# Altium PCB PCB1.PcbDoc
Units mil, origin at the board's own origin, x right, y up, seen from the top; angles counter-clockwise.
Board outline 1105 x 1305 mil, 2 copper layers (Top Layer, Bottom Layer); 29 components, 31 nets, 125 pads, 74 vias.
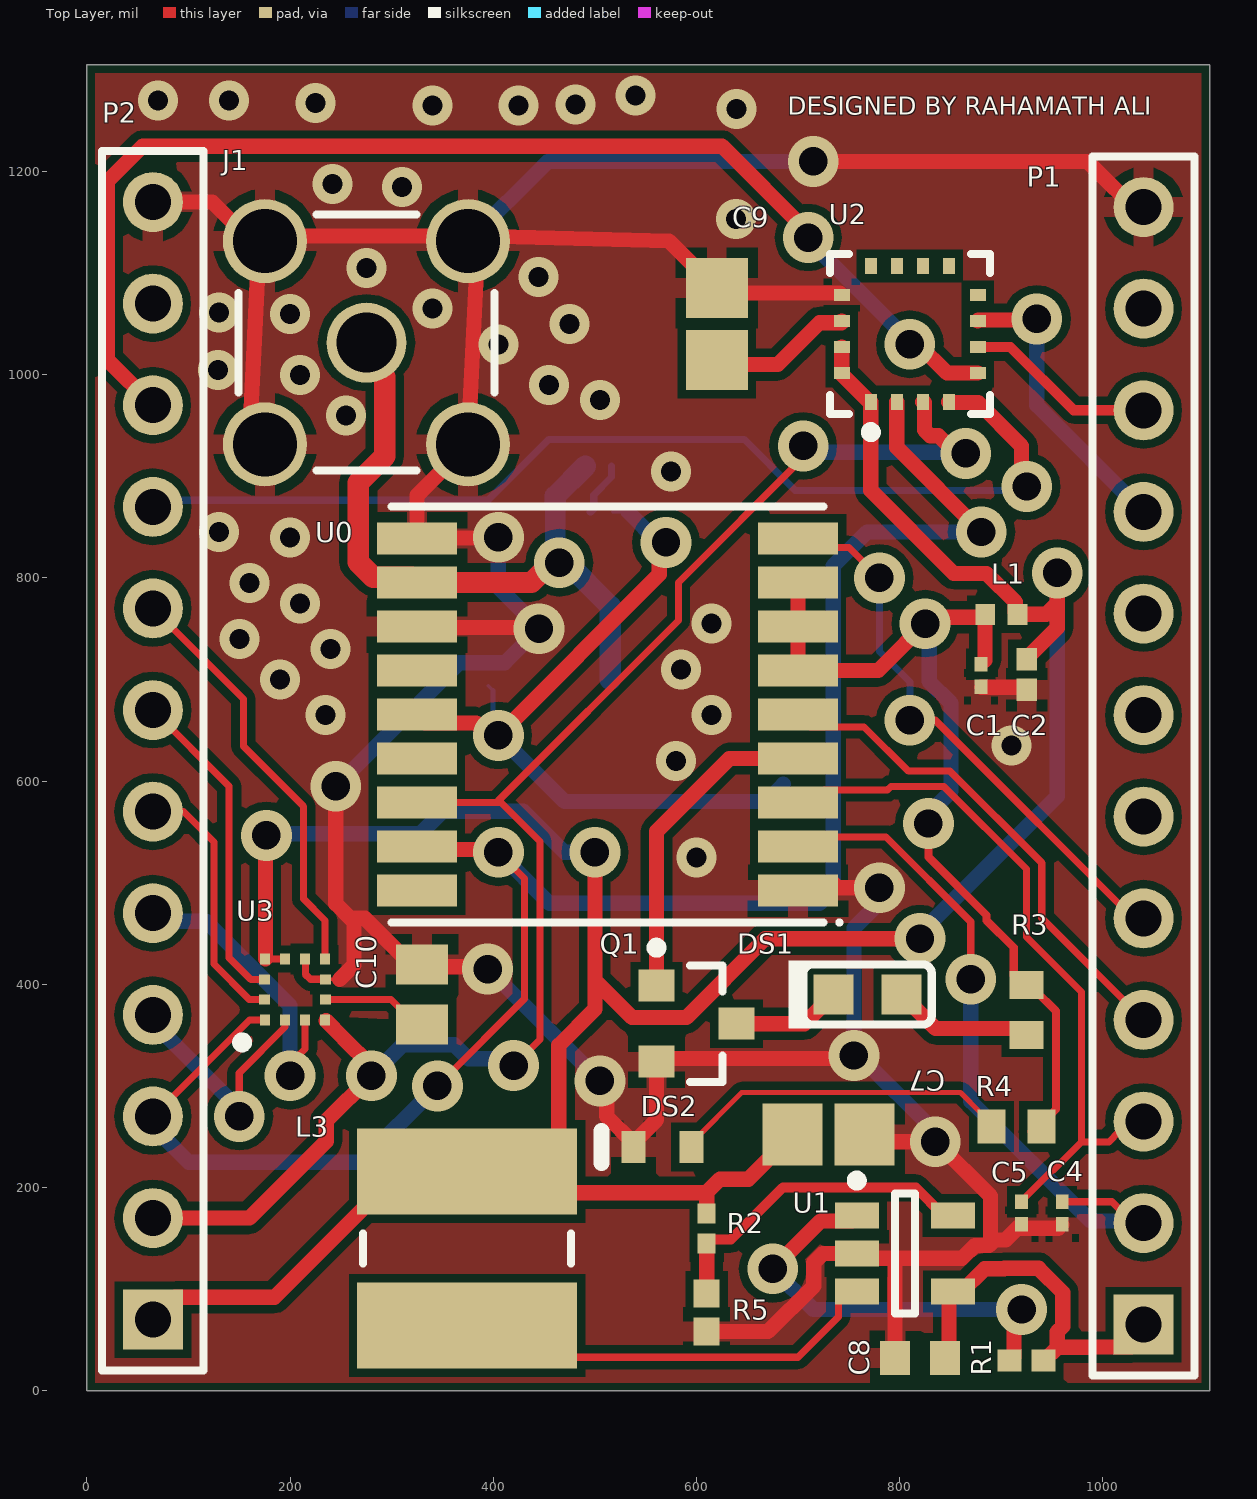
[diagram p0: Top Layer view]
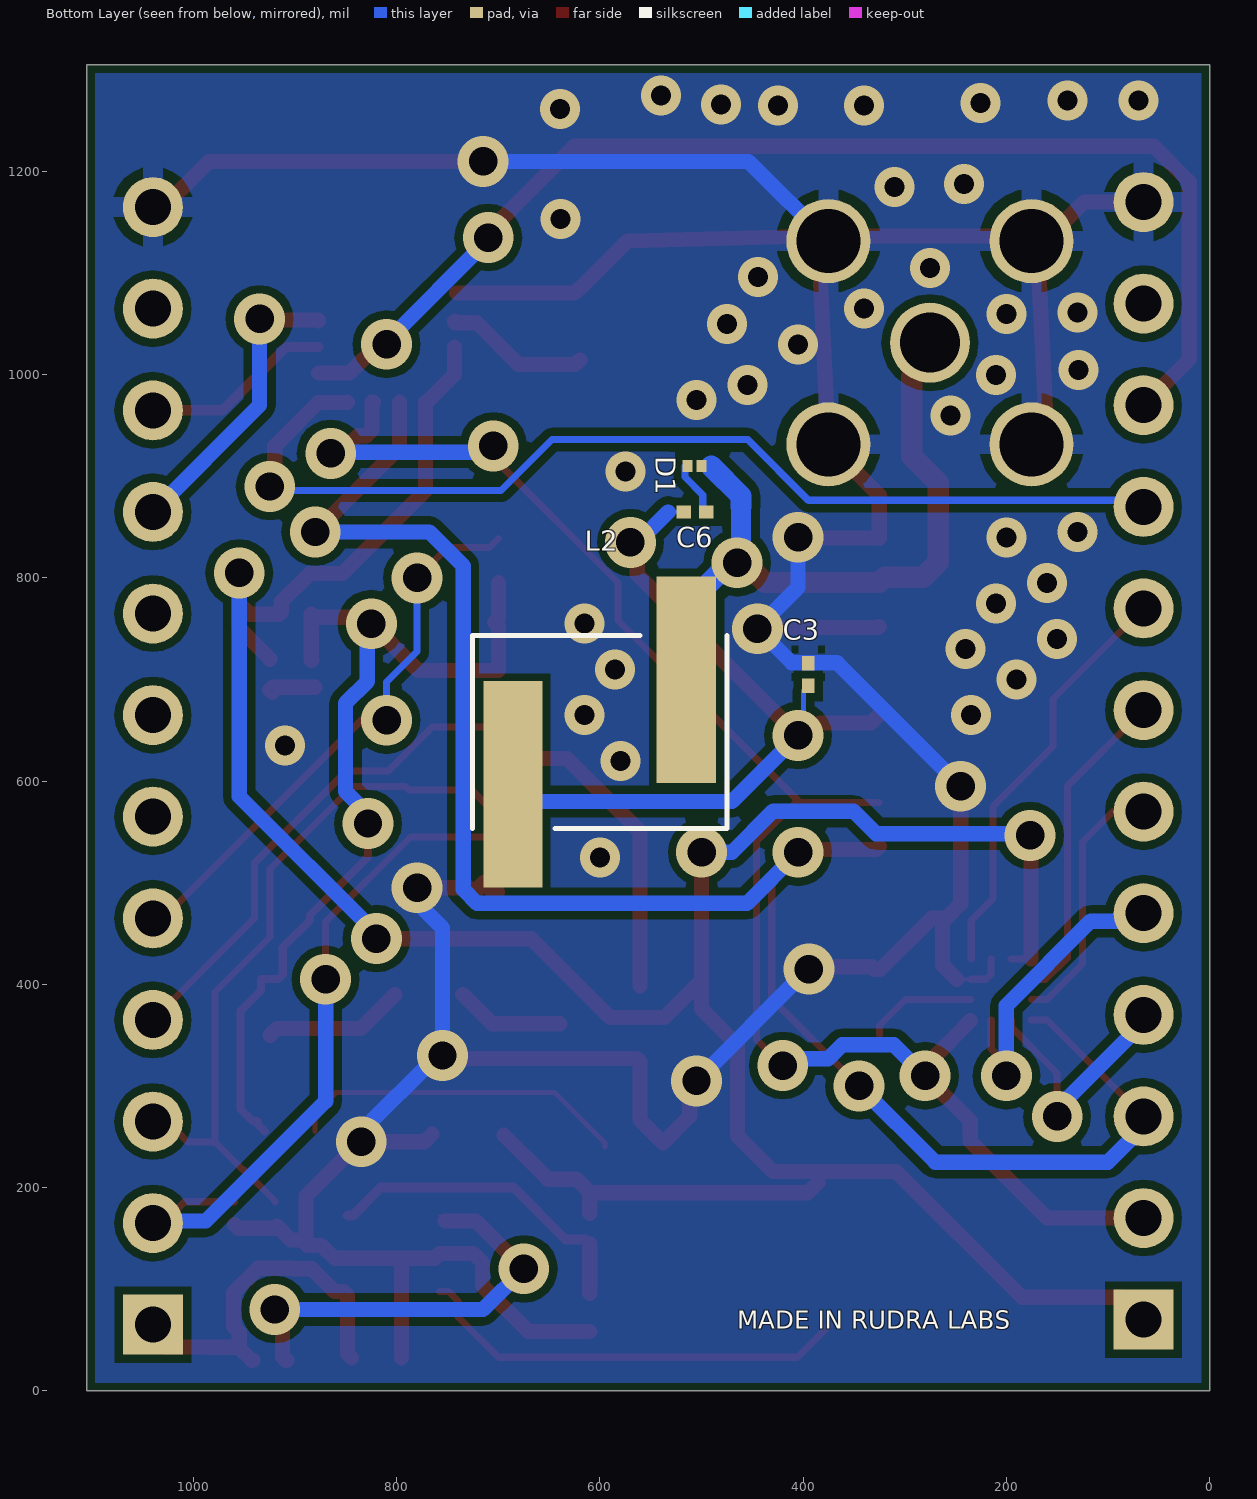
[diagram p1: Bottom Layer view, seen from below]

## Layer stack, top to bottom
Top Solder: solder mask 0.4, Solder Resist, Dk 3.5
Top Layer: signal copper 1.4
Dielectric 1: dielectric 12.6, FR-4, Dk 4.8
Bottom Layer: signal copper 1.4
Bottom Solder: solder mask 0.4, Solder Resist, Dk 3.5

## Board outline
0,0 1105,0 1105,1305 0,1305

## Design rules (kind name [scope] priority, off if disabled: settings)
BoardOutlineClearance [All] p1: gap=7.87 ignorepadtopadclearanceinfootprint=FALSE except(15.75: Arc-SplitBarrior Arc-SplitContinuation Track-SplitBarrior Track-SplitContinuation SMDPad-SplitBarrior SMDPad-SplitContinuation THPad-SplitBarrior THPad-SplitContinuation Via-SplitBarrior Via-SplitContinuation Fill-SplitBarrior Fill-SplitContinuation Poly-SplitBarrior Poly-SplitContinuation Region-SplitBarrior Region-SplitContinuation Text-SplitBarrior Text-SplitContinuation)
Clearance "Clearance Bottom Layer" [OnLayer('Bottom Layer')] p1: gap=8 ignorepadtopadclearanceinfootprint=TRUE except(10: Arc-Text Track-Text SMDPad-Text THPad-Text Via-Text Fill-Text Poly-Text Region-Text Text-Text)
Clearance "Clearance Top Layer" [OnLayer('Top Layer')] p2: gap=8 ignorepadtopadclearanceinfootprint=TRUE except(10: Arc-Text Track-Text SMDPad-Text THPad-Text Via-Text Fill-Text Poly-Text Region-Text Text-Text)
Clearance [All] p3: gap=7.87 ignorepadtopadclearanceinfootprint=FALSE except(3.5: Arc-Arc Arc-Track Arc-SMDPad Track-Track Track-SMDPad SMDPad-SMDPad; 5: Arc-Via Track-Via SMDPad-Via THPad-Via Via-Via; 10: Arc-Text Track-Text SMDPad-Text THPad-Text Via-Text Fill-Text Poly-Text Region-Text Text-Text)
HoleSize [All] p1: absolutevalues=TRUE maxlimit=248.03 minlimit=7.87 maxpercent=80.000 minpercent=20.000
MinimumAnnularRing [All] p1: minimumring=3
MinimumSolderMaskSliver [All] p1: minsoldermaskwidth=3.94
PolygonConnect PolygonConnect_1 [All] p1: thpad.connectstyle=Relief thpad.reliefconductorwidth=20 thpad.reliefentries=4 thpad.polygonreliefangle="90 Angle" thpad.airgapwidth=10 smdpad.connectstyle=Relief smdpad.reliefconductorwidth=20 smdpad.reliefentries=4 smdpad.polygonreliefangle="90 Angle" smdpad.airgapwidth=10 via.connectstyle=Direct via.reliefconductorwidth=20 via.reliefentries=4 via.polygonreliefangle="90 Angle" via.airgapwidth=10
RoutingCorners [All] p1: cornerstyle=Round minsetback=100 maxsetback=100
RoutingVias [All] p1: holewidth=19.68 width=39.37 viastyle="Through Hole" minholewidth=7.87 minwidth=17.72 maxholewidth=39.37 maxwidth=78.74
SilkToSilkClearance [All] p1: silktosilkclearance=3.94
SilkToSolderMaskClearance [IsPad] p1: minsilkscreentomaskgap=3.94 clearancetoexposedcopper=TRUE
SolderMaskExpansion [All] p1: expansion=4
Width [All] p1: maxlimit=100 minlimit=3.5 preferedwidth=15
25 further rules are at their usual default settings.

## Classes and differential pairs
component class Sheet2: C9 C10 P1 P2 U2 U3
component class Sheet1: C1 C2 C3 C4 C5 C6 C7 C8 D1 DS1 DS2 J1 L1 L2 L3 Q1 R1 R2 R3 R4 R5 U0 U1

## Components (designator, comment, footprint, x,y, rotation, side; value= is the part's Value field where it differs from the comment)
C1 "56pF" CAPC0603X33X15LL03T05 880,703.98 r90 top
C2 "10nF" CAPC1005X60X30LL05T10 925,704.96 r90 top
C3 "56pF" CAPC0603X33X15LL03T05 395,705 r90 bottom
C4 "56pF" CAPC0603X33X15LL03T05 960,175 r270 top
C5 "56pF" CAPC0603X33X15LL03T05 920,175 r270 top
C6 "56pF" CAPC0603X33X15LL03T05 506.4,865 r0 bottom
C7 "22uF" CAPC2013X145X50ML20T25 730,252.45 r180 top
C8 "4.7uF" CAPC1608X90X35LL10T15 820,32.47 r0 top
C9 "0.22uF" CAPC2013X140X50ML20T25 620,1050 r270 top
C10 "0.1uF" CAPC2013X135X45LL10T25 330,390 r270 top
D1 "ESDARF02-1BU2CK" ESDARFO2-1BU2CK 506.89,910 r180 bottom
DS1 "KP-1608MGC" KING-0603LED_GREEN_V 768.47,390 r0 top
DS2 "TLMS1000-GS08" VISH-TLMS1000_V 566.46,240 r180 top
J1 "5-1814832-1" TECO-5-1814832-1_V 275.21,1031.53 r0 top
L1 "27nF" IND1005X55X25LL5T10 900,764.18 r180 top
L2 "56nH" WE-CAIR_4248 600.24,648.42 r180 bottom
L3 "10uH" WE-PD2-MS 374.36,140 r90 top
P1 "Header 12" HDR1X12 1040,65 r90 top
P2 "Header 12" HDR1X12 65,70 r90 top
Q1 "MMBTA42LT1G" ONSC-SOT-23-3-318-08_V 600,361.31 r0 top
R1 "1M" RESC1005X40X25NL05T10 925,30 r0 top
R2 "68K" RESC1005X37X25LL05T10 610,159.76 r90 top
R3 "1K" RESC1608X55X30LL15T15 925,375 r90 top
R4 "1K" RESC1608X55X30LL15T15 915,260 r0 top
R5 "15K" RESC1005X40X25ML05T10 610,76.92 r90 top
U0 "?" "TESEO LIV 3F" 932.4,675.61 r180 top
U1 "ST1S12GR" TSOT23-5L_N 805,135 r0 top
U2 "L3GD20TR" STM-LGA16-4X4X1.1 810,1040 r90 top
U3 "LSM303AGRTR" STM-LGA-12 205,395 r90 top

## Footprints (in the part's own frame and the unit in brackets; to place one, negate y for a bottom-side part, rotate by r counter-clockwise, add the part's x,y. Pads: shape width x height; smd on the part's side, far side on the other; paste and mask are expansions set on the pad)
CAPC0603X33X15LL03T05 [mm] "Chip Capacitor, 2-Leads, Body 0.60x0.30mm, IPC High Density"
  rect 0.36x0.32 smd: 1(-0.28,0) 2(0.28,0)
  body extent -0.32,-0.17 0.32,0.17, height 0.33
CAPC1005X60X30LL05T10 [mm] "Chip Capacitor, 2-Leads, Body 1.00x0.50mm, IPC High Density"
  rect 0.56x0.52 smd: 1(-0.38,0) 2(0.38,0)
  body extent -0.53,-0.28 0.53,0.28, height 0.6
CAPC1608X90X35LL10T15 [mm] "Chip Capacitor, 2-Leads, Body 1.60x0.80mm, IPC High Density"
  rect 0.75x0.85 smd: 1(-0.625,0) 2(0.625,0)
  body extent -0.85,-0.45 0.85,0.45, height 0.9
CAPC2013X135X45LL10T25 [mm] "Chip Capacitor, 2-Leads, Body 2.00x1.25mm, IPC High Density"
  rect 1x1.3 smd: 1(-0.75,0) 2(0.75,0)
  body extent -1.05,-0.67 1.05,0.68, height 1.35
CAPC2013X140X50ML20T25 [mm] "Chip Capacitor, 2-Leads, Body 2.00x1.25mm, IPC Low Density"
  rect 1.5x1.55 smd: 1(-0.9,0) 2(0.9,0)
  body extent -1.1,-0.72 1.1,0.72, height 1.4
CAPC2013X145X50ML20T25 [mm] "Chip Capacitor, 2-Leads, Body 2.00x1.25mm, IPC Low Density"
  rect 1.5x1.55 smd: 1(-0.9,0) 2(0.9,0)
  body extent -1.1,-0.72 1.1,0.72, height 1.45
ESDARFO2-1BU2CK [mm] "Molded Capacitor, 2-Leads, Body 0.60x0.30mm, IPC Medium Density"
  rect 0.243x0.3 smd: 1(-0.175,0) 2(0.175,0)
  body extent -0.33,-0.18 0.32,0.18, height 0.28
HDR1X12 [mm] "Connector; Header; 12 Position"
  rect 1.5x1.5 hole 0.9: 1(0,0)
  round 1.5 hole 0.9: 2(2.54,0) 3(5.08,0) 4(7.62,0) 5(10.16,0) 6(12.7,0) 7(15.24,0) 8(17.78,0) 9(20.32,0) 10(22.86,0) 11(25.4,0) 12(27.94,0)
  silkscreen extent -1.27,-1.27 29.21,1.27
IND1005X55X25LL5T10 [mm] "Chip Inductor, 2-Leads, Body 1.05x0.55mm, IPC High Density"
  rect 0.49x0.52 smd: 1(-0.405,0) 2(0.405,0)
  body extent -0.52,-0.28 0.52,0.28, height 0.55
KING-0603LED_GREEN_V [mm] "SMT LED, 2-Leads, Body 1.6x0.8mm (0603-Size)"
  rect 1x1 smd paste+0 mask+0: 1(0.85,0) 2(-0.85,0)
  silkscreen extent -1.97,-0.85 1.6,0.85, body extent -0.92,-0.53 1.09,0.53, height 1.1
ONSC-SOT-23-3-318-08_V [mm] "SOT23, 3-Leads, Body 2.92x1.3mm, Pitch 0.95mm"
  rect 0.9x0.8 smd: 1(-1,0.95) 2(-1,-0.95) 3(1,0)
  silkscreen extent -1.12,-1.46 0.65,2.02, body extent -0.65,-1.46 0.65,1.46, height 1.11
RESC1005X37X25LL05T10 [mm] "Chip Resistor, 2-Leads, Body 1.00x0.50mm, IPC High Density"
  rect 0.5x0.45 smd: 1(-0.375,0) 2(0.375,0)
  body extent -0.53,-0.27 0.53,0.28, height 0.37
RESC1005X40X25ML05T10 [mm] "Chip Resistor, 2-Leads, Body 1.00x0.50mm, IPC Low Density"
  rect 0.7x0.65 smd: 1(-0.475,0) 2(0.475,0)
  body extent -0.53,-0.27 0.53,0.28, height 0.4
RESC1005X40X25NL05T10 [mm] "Chip Resistor, 2-Leads, Body 1.00x0.50mm, IPC Medium Density"
  rect 0.6x0.55 smd: 1(-0.425,0) 2(0.425,0)
  body extent -0.53,-0.27 0.53,0.28, height 0.4
RESC1608X55X30LL15T15 [mm] "Chip Resistor, 2-Leads, Body 1.60x0.80mm, IPC High Density"
  rect 0.7x0.85 smd: 1(-0.625,0) 2(0.625,0)
  body extent -0.87,-0.48 0.87,0.48, height 0.55
STM-LGA16-4X4X1.1 [mm] "LGA, 16-Leads, Body 4x4mm, Pitch 0.65mm"
  rect 0.4x0.3 smd mask+0.1: 1(-1.7,0.975) 2(-1.7,0.325) 3(-1.7,-0.325) 4(-1.7,-0.975) 9(1.7,-0.975) 10(1.7,-0.325) 11(1.7,0.325) 12(1.7,0.975)
  rect 0.3x0.4 smd mask+0.1: 5(-0.975,-1.7) 6(-0.325,-1.7) 7(0.325,-1.7) 8(0.975,-1.7) 13(0.975,1.7) 14(0.325,1.7) 15(-0.325,1.7) 16(-0.975,1.7)
  silkscreen extent -2.57,-2 2,2, body extent -2,-2 2,2, height 1.1
STM-LGA-12 [mm] "LGA, 12-Leads, Body 2x2mm, Pitch 0.5mm"
  rect 0.275x0.25 smd: 1(-0.763,0.75) 2(-0.763,0.25) 3(-0.763,-0.25) 4(-0.763,-0.75) 7(0.763,-0.75) 8(0.763,-0.25) 9(0.763,0.25) 10(0.763,0.75)
  rect 0.25x0.275 smd: 5(-0.25,-0.762) 6(0.25,-0.762) 11(0.25,0.763) 12(-0.25,0.763)
  silkscreen extent -1.45,1.2 -1.2,1.45, body extent -1,-1 1,1, height 1
TECO-5-1814832-1_V [mm] "THD, 5-Leads, Body 6.4x6.4mm, Pitch 5.08mm"
  round 2 hole 1.5: 1(0,0)
  round 2.1 hole 1.6: 2(-2.54,2.54) 3(-2.54,-2.54) 4(2.54,-2.54) 5(2.54,2.54)
  silkscreen extent -3.2,-3.2 3.2,3.2, body extent -3.21,-3.21 3.19,3.19, height 9.5
"TESEO LIV 3F" [mm] "SON, 18-Leads, Body 10.10x10.80mm, Pitch 1.10mm, IPC Medium Density"
  rect 2x0.8 smd: 1(5.908,4.654) 2(5.908,3.554) 3(5.908,2.454) 4(5.908,1.354) 5(5.908,0.254) 6(5.908,-0.846) 7(5.908,-1.946) 8(5.908,-3.046) 9(5.908,-4.146) 10(15.428,-4.146) 11(15.428,-3.046) 12(15.428,-1.946) 13(15.428,-0.846) 14(15.428,0.254) 15(15.428,1.354) 16(15.428,2.454) 17(15.428,3.554) 18(15.428,4.654)
  silkscreen extent 4.82,-4.95 16.07,5.5, body extent 5.82,-4.8 15.52,5.3, height 2.2
TSOT23-5L_N [mm] "SOT23, 5-Leads, Body 2.9x1.6mm, Pitch 0.95mm, Lead Span 2.8mm, IPC Medium Density"
  rect 1.1x0.65 smd: 1(-1.2,0.95) 2(-1.2,0) 3(-1.2,-0.95) 4(1.2,-0.95) 5(1.2,0.95)
  silkscreen extent -1.32,-1.5 0.25,1.95, body extent -0.85,-1.5 0.85,1.5, height 1.1
VISH-TLMS1000_V [mm] "SMD, 2-Leads, Body 0.8x1.6mm"
  rect 0.6x0.8 smd: 1(-0.725,0) 2(0.725,0)
  silkscreen extent 1.53,-0.4 1.53,0.4, body extent -0.8,-0.4 0.8,0.4, height 0.65
WE-CAIR_4248 [mm] "SMD Inductor, 2-Leads, Body 4.83 x 6.36mm"
  rect 1.48x5.16 smd: 1(-2.165,-1.31) 2(2.165,1.31)
  silkscreen extent -3.18,-2.42 3.18,2.42, body extent -2.38,-3.18 2.45,3.18, height 4.16
WE-PD2-MS [mm] "SMD Inductor, 2-Leads, Body 5.8 x 5.2 mm"
  rect 2.15x5.5 smd: 1(-1.925,0) 2(1.925,0)
  silkscreen extent -0.38,-2.6 0.37,2.6, body extent -2.9,-2.6 2.9,2.6, height 1.99

## Part data
C1 C3 C4 C5 C6: library part "CAP SMD 56pF 0201", "Multilayer Ceramic Capacitors MLCC - SMD/SMT 0201 56pF 50volts C0G +/-2%", Case/Package=0201, Case Code (Metric)=0603, Dielectric=C0G, Manufacturer=Murata, Manufacturer Part Number 1=GRM0335C1H560GA01D, Max Operating Temperature=125°C, Min Operating Temperature=-55°C, Package Quantity=15000, Supplier Part Number 1=490-13329-1-ND, Tolerance=2%, Voltage Rating=50V, Capacitance=56pF, Case Code (Imperial)=0201, ComponentLink1Description=https://datasheet.ciiva.com/29538/partnumbering-e-01-29538479.pdf?src-supplier=Digi-Key, ComponentLink1URL=https://datasheet.ciiva.com/29538/partnumbering-e-01-29538479.pdf?src-supplier=Digi-Key, Height=0.3mm, Length=0.024inch, Manufacturer 1=Murata, Mount="Surface Mount", Packaging="Tape and Reel", Part Number=GRM0335C1H560GA01D, Pricing 1="1=0.10000, 10=0.02000, 100=0.00900, 500=0.00644, 1000=0.00506, 2500=0.00460, 5000=0.00423 (USD)", RoHS=Yes, Stock 1=103814, Supplier 1=Digi-Key, Termination=SMD/SMT, Thickness=0.013inch, Voltage Rating (DC)=50V, Width=0.012inch
C2: library part CMP-2008-02243-1, Manufacturer=Kemet, Part Number=C0402C103J4RAC7867
C7: library part "CAP SMD 22uF 0805", "Capacitor, Ceramic, SMD, / MLCC, Temperature Stable, / Class II, 22 uF, +/-20%, 6.3 V, / X5R, 0805", Case/Package=0805, Case Code (Metric)=2012, Dielectric=X5R, Dielectric Material=Ceramic, Manufacturer=Kemet, Manufacturer 1=KEMET, Manufacturer Part Number 1=C0805C226M9PACTU, Max Operating Temperature=85°C, Min Operating Temperature=-55°C, Package Quantity=2500, Part Number=C0805C226M9PAC7800, Supplier Part Number 1=399-4696-1-ND, Tolerance=20%, Voltage=6.3V, Capacitance=22uF, Case Code (Imperial)=0805, ComponentLink1Description=https://datasheet.ciiva.com/18193/getdatasheetpartid-344134-18193702.pdf?src-supplier=Verical, ComponentLink1URL=https://datasheet.ciiva.com/18193/getdatasheetpartid-344134-18193702.pdf?src-supplier=Verical, ComponentLink2Description=https://datasheet.ciiva.com/7842/40889-7842585.pdf?src-supplier=Element14, ComponentLink2URL=https://datasheet.ciiva.com/7842/40889-7842585.pdf?src-supplier=Element14, Depth=1.25mm, Dissipation Factor=5%, Height=1.25mm, Lead Free="Lead Free", Length=2mm, Mount="Surface Mount", Packaging="Tape and Reel", Pricing 1="1=0.24000, 10=0.16600, 100=0.08410, 500=0.05758, 1000=0.05093 (USD)", Radiation Hardening=No, RoHS=Yes, Stock 1=115947, Supplier 1=Digi-Key, Termination=SMD/SMT, Voltage Rating=6.3V, Voltage Rating (DC)=6.3V, Width=1.2mm
C8: library part CMP-2006-02523-1, "0603 4.7 uF 25 V ±10 % Tolerance X5R SMT Multilayer Ceramic Capacitor Ceramic Capacitors 0.09620", Manufacturer=Murata, Part Number=GRM188R61E475KE11D
C9: library part "CAP SMD 0.22uF 0805", "CAP CER 0.22UF 25V X7R 0805", Capacitance=220nF, Case/Package=0805, Case Code (Metric)=2012, Dielectric=X7R, Dielectric Material=Ceramic, Manufacturer="AVX Interconnect / Elco", Manufacturer 1="Kyocera AVX", Manufacturer Part Number 1=08053C224JAT2A, Max Operating Temperature=125°C, Min Operating Temperature=-55°C, Package Quantity=1, Supplier Part Number 1=478-3756-1-ND, Tolerance=5%, Voltage=25V, Case Code (Imperial)=0805, ComponentLink1Description=https://datasheet.ciiva.com/5417/cx7r-218113-5417493.pdf?src-supplier=Mouser, ComponentLink1URL=https://datasheet.ciiva.com/5417/cx7r-218113-5417493.pdf?src-supplier=Mouser, ComponentLink2Description=https://datasheet.ciiva.com/16326/cx7r-16326599.pdf?src-supplier=Future+Electronics, ComponentLink2URL=https://datasheet.ciiva.com/16326/cx7r-16326599.pdf?src-supplier=Future+Electronics, ComponentLink3Description=https://datasheet.ciiva.com/162/cx7r-162344.pdf?src-supplier=Digi-Key, ComponentLink3URL=https://datasheet.ciiva.com/162/cx7r-162344.pdf?src-supplier=Digi-Key, ComponentLink4Description=https://datasheet.ciiva.com/162/cx7r-162345.pdf?src-supplier=Digi-Key, ComponentLink4URL=https://datasheet.ciiva.com/162/cx7r-162345.pdf?src-supplier=Digi-Key, ComponentLink5Description=https://datasheet.ciiva.com/162/cx7r-162346.pdf?src-supplier=Digi-Key, ComponentLink5URL=https://datasheet.ciiva.com/162/cx7r-162346.pdf?src-supplier=Digi-Key, ComponentLink6Description=https://datasheet.ciiva.com/17494/cx7r-17494874.pdf?src-supplier=Avnet+Europe, ComponentLink6URL=https://datasheet.ciiva.com/17494/cx7r-17494874.pdf?src-supplier=Avnet+Europe, ComponentLink7Description=https://datasheet.ciiva.com/14594/70001075-14594669.pdf?src-supplier=Allied+Electronics, ComponentLink7URL=https://datasheet.ciiva.com/14594/70001075-14594669.pdf?src-supplier=Allied+Electronics, ComponentLink8Description=https://datasheet.ciiva.com/7811/cx7r-7811999.pdf?src-supplier=Element14, ComponentLink8URL=https://datasheet.ciiva.com/7811/cx7r-7811999.pdf?src-supplier=Element14, Contact Plating=Tin,Matte, Depth=1.25mm, Height=1.4mm, Lead Free="Lead Free", Length=2.01mm, Mount="Surface Mount,PCB", Number of Pins=2, Packaging="Tape and Reel", Part Number=08053C224JAT2A, Pricing 1="1=0.28000, 10=0.19000, 100=0.09610, 500=0.06578, 1000=0.05819 (USD)", Radiation Hardening=No, REACH SVHC="No SVHC", RoHS=Yes, Stock 1=18745, Supplier 1=Digi-Key, Termination=SMD/SMT, Thickness=0.055inch, Voltage Rating=25V, Voltage Rating (DC)=25V, Width=1.25mm
C10: library part "CAP SMD 0.1uF 0805", "Chip Capacitor, 0.1 uF, +/- 10%, 50 V, -55 to 125 degC, 0805 (2012 Metric), RoHS, Tape and Reel", Capacitance=100nF, Case/Package=0805, Case Code (Metric)=2012, Dielectric=X7R, Dielectric Material=Ceramic, Insulation Resistance=10GR, Manufacturer=Murata, Manufacturer Part Number 1=GRM21BR71H104KA01L, Max Operating Temperature=125degC, Min Operating Temperature=-55degC, Package Description="2-Pin Surface Mount Device, Body 2 x 1.25 mm", Package Quantity=1, Supplier Part Number 1=GRM21BR71H104KA01L-REEL, Tolerance=10%, Voltage=50V, Case Code (Imperial)=0805, ComponentLink1Description=https://datasheet.ciiva.com/11786/0900766b8003061f-11786305.pdf?src-supplier=RSComponents, ComponentLink1URL=https://datasheet.ciiva.com/11786/0900766b8003061f-11786305.pdf?src-supplier=RSComponents, ComponentLink2Description=https://datasheet.ciiva.com/20173/71-2024-20173169.pdf?src-supplier=Rapid+Electronics, ComponentLink2URL=https://datasheet.ciiva.com/20173/71-2024-20173169.pdf?src-supplier=Rapid+Electronics, ComponentLink3Description=https://datasheet.ciiva.com/29200/453120-da-01-en-vs-kondensator-0805-29200537.pdf?src-supplier=Conrad, ComponentLink3URL=https://datasheet.ciiva.com/29200/453120-da-01-en-vs-kondensator-0805-29200537.pdf?src-supplier=Conrad, ComponentLink4Description=https://datasheet.ciiva.com/132/partnumbering-e-01-132209.pdf?src-supplier=Digi-Key, ComponentLink4URL=https://datasheet.ciiva.com/132/partnumbering-e-01-132209.pdf?src-supplier=Digi-Key, ComponentLink5Description=https://datasheet.ciiva.com/132/partnumbering-e-01-132210.pdf?src-supplier=Digi-Key, ComponentLink5URL=https://datasheet.ciiva.com/132/partnumbering-e-01-132210.pdf?src-supplier=Digi-Key, ComponentLink6Description=https://datasheet.ciiva.com/132/partnumbering-e-01-132211.pdf?src-supplier=Digi-Key, ComponentLink6URL=https://datasheet.ciiva.com/132/partnumbering-e-01-132211.pdf?src-supplier=Digi-Key, ComponentLink7Description=https://datasheet.ciiva.com/7937/1794405-7937708.pdf?src-supplier=Element14, ComponentLink7URL=https://datasheet.ciiva.com/7937/1794405-7937708.pdf?src-supplier=Element14, ComponentLink8Description=https://datasheet.ciiva.com/7937/1794405-7937709.pdf?src-supplier=Element14, ComponentLink8URL=https://datasheet.ciiva.com/7937/1794405-7937709.pdf?src-supplier=Element14, ComponentLink9Description=https://datasheet.ciiva.com/28534/1769893-28534317.pdf?src-supplier=Element14, ComponentLink9URL=https://datasheet.ciiva.com/28534/1769893-28534317.pdf?src-supplier=Element14, ComponentLink10Description=https://datasheet.ciiva.com/7937/4360-7937710.pdf?src-supplier=Element14, ComponentLink10URL=https://datasheet.ciiva.com/7937/4360-7937710.pdf?src-supplier=Element14, Datasheet URL=http://psearch.en.murata.com/capacitor/product/GRM21BR71H104KA01%23.pdf, Datasheet Version=42675.0, Depth=1.25mm, Height=1.25mm, Lead Free=LeadFree, Length=2mm, Manufacturer 1=Murata, Manufacturer URL=http://www.murata.com/, Material=Ceramic, Mount=SurfaceMount, Number of Pins=2, Package Reference=0805, Packaging=TapeandReel, Pricing 1="3000=0.01700 (USD)", Radiation Hardening=No, REACH SVHC=Unknown, RoHS=Yes, RoHSCompliant=true, Stock 1=7476000, Supplier 1="Future Electronics", Termination=SMD/SMT, Thickness=0.053inch, Voltage Rating=50V, Voltage Rating (DC)=50V, Width=0.049inch
D1: "TVS DIODE 3.6V 12V 0201", Case/Package=0201, Clamping Voltage=12V, Manufacturer 1=STMicroelectronics, Max Operating Temperature=150°C, Min Breakdown Voltage=5V, Min Operating Temperature=-40°C, Peak Pulse Current=1A, Peak Pulse Power=20W, Power Line Protection=No, Reverse Standoff Voltage=3.6V, Supplier Part Number 1=497-16252-1-ND, ComponentLink1Description=http://www.farnell.com/datasheets/2025703.pdf?src-supplier=Farnell, ComponentLink1URL=http://www.farnell.com/datasheets/2025703.pdf?src-supplier=Farnell, ComponentLink2Description=http://www.mouser.com/ds/2/389/esdarf02-1bu2ck-954652.pdf?src-supplier=Mouser, ComponentLink2URL=http://www.mouser.com/ds/2/389/esdarf02-1bu2ck-954652.pdf?src-supplier=Mouser, ComponentLink3Description=http://www.st.com/content/ccc/resource/technical/document/datasheet/6d/11/74/c3/f2/d5/43/1b/DM00090692.pdf/files/DM00090692.pdf/jcr:content/translations/en.DM00090692.pdf?src-supplier=Digi-Key, ComponentLink3URL=http://www.st.com/content/ccc/resource/technical/document/datasheet/6d/11/74/c3/f2/d5/43/1b/DM00090692.pdf/files/DM00090692.pdf/jcr:content/translations/en.DM00090692.pdf?src-supplier=Digi-Key, ComponentLink4Description=http://www.farnell.com/datasheets/2025703.pdf?src-supplier=Element14, ComponentLink4URL=http://www.farnell.com/datasheets/2025703.pdf?src-supplier=Element14, Composition=Zener, Manufacturer Part Number 1=ESDARF02-1BU2CK, Mount="Surface Mount", Number of Bidirectional Channels=1, Number of Pins=2, Packaging="Cut Tape", Polarity=Bidirectional, Pricing 1="1=0.33000, 10=0.24700, 100=0.11740, 500=0.09580, 1000=0.07107, 2500=0.06242, 5000=0.05717 (USD)", REACH SVHC="No SVHC", RoHS=Yes, Stock 1=134, Supplier 1=Digi-Key
DS1: library part CMP-0404-00001-1, "LED, SMT, 0603(1608), 1.1mm thickness, Green", Forward Current="30 mA", Manufacturer=Kingbright, Power Dissipation="75 mW", Reverse Voltage="5 V", Storage Temperature="-40 to +85 degC", ComponentLink1Description="Manufacturer URL", ComponentLink1URL=http://www.kingbright.com/, Mounting Technology="Surface Mount", PackageDescription="2-Pin SMT LED, 1.6 x 0.8 mm Pitch", PackageReference=0603LED_GREEN, Packing Type="2000 pcs / reel", PartNumber=KP-1608MGC
DS2: library part CMP-2000-07254-1, "Low Current LED, 40 mW, 1.8 V, -40 to 100 degC, 2-Pin SMD (0603), RoHS, Tape and Reel", Forward Current If=2mA, Forward Voltage=1.8V, LED Colour=Red, Manufacturer=Vishay, Package Description="2-Pin Surface Mount Device, Body 1.6 x 0.8 mm", Package Reference=TLMS1000, Automotive Qualification Standard=AEC-Q100, Bulb Size=1.6mmx0.8mm, Datasheet URL=https://datasheet.ciiva.com/5798/1698881-5798337.pdf, Datasheet Version="Rev. 1.7, 02/2011", LED Mounting=SMD, Lens Shape=Rectangular, Luminous Intensity=4mcd, Manufacturer URL=http://www.vishay.com/, Mounting Technology=SurfaceMount, MSL=MSL2-1year, Packaging=CutTape, Product Range=-, SVHC=ToBeAdvised, Viewing Angle=80°, Wavelength Typ=636nm
J1: library part CMP-2000-05415-1, "SMA Connector, Pitch 5.08 mm, 1 Position, Height 9.5 mm, Tail Length 4 mm, -65 to 165 degC, RoHS, Bulk", Frequency Max=3GHz, Manufacturer="TE Connectivity", Package Description="SMA Connector, Pitch 5.08 mm, 1 Position, Height 9.5 mm, Tail Length 4 mm", Coaxial Cable Types=-, Coaxial Termination=Solder, Connector Body Style=StraightJack, Connector Mounting=PCBMount, Connector Type=SMACoaxial, Contact Material=BerylliumCopper, Contact Plating=GoldPlatedContacts, Datasheet URL=http://www.onlinecomponents.com/productFiles/mf-AMP/eng_cd_1814832_a.pdf, Datasheet Version="Rev. B1, 03/2011", Impedance=50ohm, Manufacturer URL=http://www.te.com/, Package Reference=5-1814832-1, Product Range=ZDCSeries, SVHC=NoSVHC(15-Jun-2015)
L1: library part "IND SMD 27nH 0.3A", "Chip Inductor, 27 nH, 5%, 300 mA, -55 to 125 degC, 2-Pin SMD (0402), RoHS, Tape and Reel", Current Rating=300mA, DC Resistance (DCR)=460mOhmMax, Frequency - Self Resonant=1.7GHz, Frequency - Test=100MHz, Inductance=27nH, Manufacturer=Murata, Operating Temperature=-55°C~125°C, Package / Case=0402(1005Metric), Package Description="2-Pin Surface Mount Device, Body 1 x 0.5 mm", Package Reference=0402, Q @ Freq=8@100MHz, Standard Package=10,000, Supplier Part Number 1=490-2628-1-ND, Tolerance=±5%, Catalog Drawings=LQG15HSSeriesTopLQG15HSSeriesEnd, Category=Inductors,Coils,Chokes, Datasheet URL=http://download.siliconexpert.com/pdfs/2010/9/19/0/28/16/422/mrt_/manual/l0075s0083lqg15hs.pdf, Datasheet Version=09/2010, Family=FixedInductors, Height - Seated (Max)="0.022\"(0.55mm)", Manufacturer URL=http://www.murata.com/, Material - Core=Air, Mounting Technology=SurfaceMount, Mounting Type=SurfaceMount, Online Catalog=LQG15HxSeries, Other Names=490-2628-2, Packaging=Tape&Reel(TR), Product Training Modules=InductorProducts, Series=LQG15HS, Shielding=Unshielded, Size / Dimension="0.039\"Lx0.020\"W(1.00mmx0.50mm)", Supplier 1=Digi-Key, Type=Multilayer
L2: library part CMP-1497-00011-1, "WE-CAIR Air Coil, L=56 nH", Inductance="56 nH", Manufacturer="Wuerth Elektronik", PartNumber=744912156, ComponentLink1Description="Manufacturer URL", ComponentLink1URL=http://www.we-online.com, ComponentLink2Description=Datasheet, ComponentLink2URL=http://katalog.we-online.de/kataloge/eisos/media/pdf/744912156.pdf, PackageReference=WE-CAIR_4248
L3: library part CMP-0227-00513-1, "SMD Power Inductor WE-PD2, L = 10.0 µH", Inductance="10.0 µH", ComponentLink1Description="Manufacturer Link", ComponentLink1URL=http://www.we-online.com, ComponentLink2Description=Datasheet, ComponentLink2URL=http://www.we-online.de/katalog/media/pdf/7447745100.pdf, DatasheetVersion="ver 2, May-2009", PackageDescription="SMD Inductor, 2-Leads, Body 5.8 x 5.2 mm", PackageReference=WE-PD2-MS, PackageVersion=2009
P1 P2: "Header, 12-Pin", LatestRevisionDate=17-Jul-2002, LatestRevisionNote="Re-released for DXP Platform.", Publisher="Altium Limited"
Q1: library part CMP-1048-00662-1, "High Voltage Transistor, NPN Silicon, 3-Pin SOT-23, Pb-Free, Tape and Reel", Manufacturer="On Semiconductor", ComponentLink1Description="Manufacturer URL", ComponentLink1URL=http://www.onsemi.com/, ComponentLink2Description=Datasheet, ComponentLink2URL=http://www.onsemi.cn/pub_link/Collateral/MMBTA42LT1-D.PDF, ComponentLink3Description="Package Specification", ComponentLink3URL=http://www.onsemi.cn/pub_link/Collateral/318-08.PDF, DatasheetVersion="Rev. 12", fT Min (MHz)=50, IC Continuous (A)=0.5, Mounting Technology="Surface Mount", PackageDescription="3-Pin Small Outline Transistor, Body 2.92 x 1.3 mm, Pitch 0.95 mm", PackageReference=SOT-23-3-318-08, PackageVersion="Rev. AP, 11/2009", Packing="Tape and Reel", PartNumber=MMBTA42LT1G, Polarity=NPN, RoHS=TRUE
R1: library part "RES SMD 1M 0402", "RC0402JR-071ML Checked RES SMD 1M OHM 5% 1/16W 0402 Chip SMD Resistors 0.00590", Manufacturer="Yageo / Phycomp", Part Number=RC0402JR-071ML, Supplier Part Number 1=311-1.0MJRCT-ND, Supplier 1=Digi-Key
R2: library part "RES SMD 68K 0402", "Surface mount chip resistor 68K; / 1%; 1/16 W", Case/Package=0402, Case Code (Metric)=1005, Manufacturer=Yageo, Manufacturer Part Number 1=AC0402FR-0768KL, Max Operating Temperature=155°C, Max Power Dissipation=63mW, Min Operating Temperature=-55°C, Power Rating=62.5mW, Resistance=68kR, Supplier Part Number 1=YAG3506CT-ND, Temperature Coefficient=100ppm/°C, Tolerance=1%, Voltage Rating=50V, Case Code (Imperial)=0402, ComponentLink1Description=http://www.mouser.com/ds/2/447/yageodocoutput-1111992.pdf?src-supplier=Mouser, ComponentLink1URL=http://www.mouser.com/ds/2/447/yageodocoutput-1111992.pdf?src-supplier=Mouser, ComponentLink2Description=http://www.yageo.com/NewPortal/yageodocoutput?fileName=/pdf/R-Chip/PYu-AC_51_RoHS_L_6.pdf&src-supplier=Digi-Key, ComponentLink2URL=http://www.yageo.com/NewPortal/yageodocoutput?fileName=/pdf/R-Chip/PYu-AC_51_RoHS_L_6.pdf&src-supplier=Digi-Key, ComponentLink3Description=http://www.yageo.com/documents/recent/PYu-AC_51_RoHS_L_2_revised.pdf?src-supplier=Future+Electronics, ComponentLink3URL=http://www.yageo.com/documents/recent/PYu-AC_51_RoHS_L_2_revised.pdf?src-supplier=Future+Electronics, Composition="Thick Film", Features="Moisture Resistant,Automotive AEC-Q200", Height=0.015inch, Lead Free="Lead Free", Length=0.039inch, Manufacturer 1=Yageo, Number of Terminations=2, Packaging="Tape and Reel", Part Number=AC0402FR-0768KL, Pricing 1="1=0.10000, 10=0.02100, 100=0.00870, 1000=0.00390, 2500=0.00338, 5000=0.00279 (USD)", RoHS=Yes, Stock 1=97686, Supplier 1=Digi-Key, Termination=SMD/SMT, Width=0.02inch
R3 R4: library part CMP-2000-00180-1, Manufacturer=Panasonic, Part Number=ERJ-3EKF1001V
R5: library part "RES SMD 15K 0402", "Surface mount chip resistor / 15 K; 1%; 1/16 W", Case/Package=0402, Case Code (Metric)=1005, Manufacturer="Yageo / Phycomp", Manufacturer 1=Yageo, Manufacturer Part Number 1=RC0402FR-1315KL, Max Operating Temperature=155°C, Min Operating Temperature=-55°C, Power Rating=62.5mW, Resistance=15kR, Supplier Part Number 1=603-RC0402FR-1315KL, Temperature Coefficient=100ppm/°C, Tolerance=1%, Voltage Rating=50V, Case Code (Imperial)=0402, ComponentLink1Description=https://datasheet.ciiva.com/16866/pyu-rc0402-51-rohs-l-6-16866521.pdf?src-supplier=Avnet+Europe, ComponentLink1URL=https://datasheet.ciiva.com/16866/pyu-rc0402-51-rohs-l-6-16866521.pdf?src-supplier=Avnet+Europe, ComponentLink2Description=https://datasheet.ciiva.com/28404/pyu-rc0402-51-rohs-l-6-28404185.pdf?src-supplier=Avnet+Europe, ComponentLink2URL=https://datasheet.ciiva.com/28404/pyu-rc0402-51-rohs-l-6-28404185.pdf?src-supplier=Avnet+Europe, ComponentLink3Description=https://datasheet.ciiva.com/17423/pyu-rc0402-51-rohs-l-6-r-17423757.pdf?src-supplier=Future+Electronics, ComponentLink3URL=https://datasheet.ciiva.com/17423/pyu-rc0402-51-rohs-l-6-r-17423757.pdf?src-supplier=Future+Electronics, Composition="Thick Film", Contact Plating=Tin,Matte, Depth=0.5mm, Height=0.35mm, Lead Free="Lead Free", Length=1mm, Military Standard=Not, Packaging="Tape and Reel", Part Number=RC0402FR-1315KL, Pricing 1="1=0.10000, 10=0.01200, 100=0.00400, 1000=0.00300, 2500=0.00300, 10000=0.00300 (USD)", RoHS=Yes, Stock 1=90985, Supplier 1=Mouser, Termination=SMD/SMT, Width=0.5mm
U0: library part TESEO-LIV3F, "GNSS MODULE", Manufacturer 1=STMicroelectronics, Supplier Part Number 1=497-18163-1-ND, ComponentLink1Description=https://media.digikey.com/pdf/Data%20Sheets/ST%20Microelectronics%20PDFS/Intro_to_GNSS_Teseo_LIV3F_for_IoT_9-12-18.pdf?src-supplier=Digi-Key, ComponentLink1URL=https://media.digikey.com/pdf/Data%20Sheets/ST%20Microelectronics%20PDFS/Intro_to_GNSS_Teseo_LIV3F_for_IoT_9-12-18.pdf?src-supplier=Digi-Key, ComponentLink2Description=https://www.st.com/resource/en/datasheet/teseo-liv3f.pdf?src-supplier=Digi-Key, ComponentLink2URL=https://www.st.com/resource/en/datasheet/teseo-liv3f.pdf?src-supplier=Digi-Key, Manufacturer Part Number 1=TESEO-LIV3F, Pricing 1="1=14.93000, 10=13.50600, 100=11.37360, 500=9.95190 (USD)", RoHS=No, Stock 1=1024, Supplier 1=Digi-Key
U1: library part "Syn Buck Converter", "Synchronous rectification with inhibit, 0.7 A, 1.7 MHz adjustable, step-down switching regulator, 5-Pin TSOT, Tape and Reel", Case/Package=TSOT, Manufacturer 1=STMicroelectronics, Max Input Voltage=5.5V, Max Operating Temperature=125°C, Max Output Current=700mA, Max Output Voltage=5V, Min Input Voltage=2.5V, Min Operating Temperature=-40°C, Min Output Voltage=600mV, Output Voltage=1.2V, Package Quantity=1, Supplier Part Number 1=497-6906-1-ND, Switching Frequency=1.7MHz, ComponentLink1Description=https://datasheet.ciiva.com/16220/cd00181873-16220420.pdf?src-supplier=Future+Electronics, ComponentLink1URL=https://datasheet.ciiva.com/16220/cd00181873-16220420.pdf?src-supplier=Future+Electronics, ComponentLink2Description=https://datasheet.ciiva.com/15113/getdatasheetpartid-164460-15113322.pdf?src-supplier=Verical, ComponentLink2URL=https://datasheet.ciiva.com/15113/getdatasheetpartid-164460-15113322.pdf?src-supplier=Verical, ComponentLink3Description=https://datasheet.ciiva.com/17367/cd00181873-17367226.pdf?src-supplier=Avnet+Europe, ComponentLink3URL=https://datasheet.ciiva.com/17367/cd00181873-17367226.pdf?src-supplier=Avnet+Europe, ComponentLink4Description=https://datasheet.ciiva.com/2025/cd00181873-2025213.pdf?src-supplier=Digi-Key, ComponentLink4URL=https://datasheet.ciiva.com/2025/cd00181873-2025213.pdf?src-supplier=Digi-Key, ComponentLink5Description=https://datasheet.ciiva.com/2025/cd00181873-2025214.pdf?src-supplier=Digi-Key, ComponentLink5URL=https://datasheet.ciiva.com/2025/cd00181873-2025214.pdf?src-supplier=Digi-Key, ComponentLink6Description=https://datasheet.ciiva.com/2025/cd00181873-2025215.pdf?src-supplier=Digi-Key, ComponentLink6URL=https://datasheet.ciiva.com/2025/cd00181873-2025215.pdf?src-supplier=Digi-Key, ComponentLink7Description=https://datasheet.ciiva.com/41457/001185701-da-01-en-ic-reg-buck-sync-a-st1s12gr-sot-23-5-stm-41457541.pdf?src-supplier=Conrad, ComponentLink7URL=https://datasheet.ciiva.com/41457/001185701-da-01-en-ic-reg-buck-sync-a-st1s12gr-sot-23-5-stm-41457541.pdf?src-supplier=Conrad, Efficiency=90%, Lead Free="Lead Free", Manufacturer Part Number 1=ST1S12GR, Mount="Surface Mount", Number of Outputs=1, Number of Pins=5, Operating Supply Voltage=5.5V, Output Current=700mA, Output Type=Adjustable, Packaging="Tape and Reel", Pricing 1="1=1.06000, 10=0.94500, 100=0.68870, 500=0.57660, 1000=0.44846 (USD)", Radiation Hardening=No, REACH SVHC="No SVHC", RoHS=Yes, Stock 1=672, Supplier 1=Digi-Key, Synchronous Rectifier=Yes
U2: library part GYROSCOPE, "MEMS Motion Sensor: Three-Axis Digital Output Gyroscope, 2.4 to 3.6 V, -40 to 85 degC, 16-Pin LGA, RoHS, Tape and Reel", Case/Package=LGA, Manufacturer=STMicroelectronics, Max Operating Temperature=85°C, Max Supply Voltage=3.6V, Min Operating Temperature=-40°C, Min Supply Voltage=2.4V, Nominal Supply Current=6.1mA, Package Quantity=3000, Supply Current="6.1 mA", Supply Current In Sleep Mode="2 mA", Supply Voltage="2.4 to 3.6 V", Temperature Range="-40 to 85 degC", ComponentLink1Description="Manufacturer URL", ComponentLink1URL=http://www.st.com/, ComponentLink2Description=Datasheet, ComponentLink2URL=http://www.st.com/web/en/resource/technical/document/datasheet/DM00036465.pdf, ComponentLink3Description="Package Specification", ComponentLink3URL=http://www.st.com/web/en/resource/technical/document/datasheet/DM00036465.pdf, ComponentLink4Description=https://datasheet.ciiva.com/2815/dm00036465-2815728.pdf?src-supplier=Digi-Key, ComponentLink4URL=https://datasheet.ciiva.com/2815/dm00036465-2815728.pdf?src-supplier=Digi-Key, ComponentLink5Description=https://datasheet.ciiva.com/2815/dm00036465-2815729.pdf?src-supplier=Digi-Key, ComponentLink5URL=https://datasheet.ciiva.com/2815/dm00036465-2815729.pdf?src-supplier=Digi-Key, ComponentLink6Description=https://datasheet.ciiva.com/12092/dm00036465-12092269.pdf?src-supplier=Mouser, ComponentLink6URL=https://datasheet.ciiva.com/12092/dm00036465-12092269.pdf?src-supplier=Mouser, ComponentLink7Description=https://datasheet.ciiva.com/2815/dm00036465-2815727.pdf?src-supplier=Digi-Key, ComponentLink7URL=https://datasheet.ciiva.com/2815/dm00036465-2815727.pdf?src-supplier=Digi-Key, DatasheetVersion="Rev. 2", Full Scales="250, 500, 2000 dps", Height=1mm, Interface=I2C,SPI, Lead Free="Lead Free", Length=4mm, Linearity=0.2%, Manufacturer 1=STMicroelectronics, Manufacturer Part Number 1=L3GD20TR, Mounting Technology="Surface Mount", Number of Pins=16, Operating Supply Current=6.1mA, Operating Supply Voltage=3.6V, Output Type=SPI,I2C,Digital, PackageDescription="16-Pin Land Grid Array Package, Body 4 x 4 mm, Pitch 0.65 mm", PackageReference=LGA16-4X4X1.1, PackageVersion="Rev. 2", Packaging="Tape and Reel", Packing="Tape and Reel", PartNumber=L3GD20TR, REACH SVHC="No SVHC", RoHS=TRUE, SoDr="+/- 2%", Stock 1=0, Supplier 1=Avnet, Supplier Part Number 1=L3GD20TR, Width=4mm
U3: library part E-COMPASS, "Ultra-Compact High-Performance Ecompass Module: Ultra-Low-Power 3D Accelerometer and 3D Magnetometer, 1.71 to 3.6 V, -40 to 85 degC, 12-Pin LGA, RoHS, Tape and Reel", Case/Package=LGA, Manufacturer=STMicroelectronics, Max Operating Temperature=85degC, Max Supply Voltage=3.6V, Min Operating Temperature=-40degC, Min Supply Voltage=1.71V, Package Description="12-Pin Land Grid Array Package, Body 2 x 2 mm, Pitch 0.5 mm", Package Reference=LGA-12, Supplier Part Number 1=497-16527-6-ND, Case\/Package=LGA, ComponentLink1Description=https://www.mouser.com/ds/2/389/lsm303agr-954987.pdf?src-supplier=Mouser, ComponentLink1URL=https://www.mouser.com/ds/2/389/lsm303agr-954987.pdf?src-supplier=Mouser, ComponentLink2Description=http://www.farnell.com/datasheets/2151221.pdf?src-supplier=Farnell, ComponentLink2URL=http://www.farnell.com/datasheets/2151221.pdf?src-supplier=Farnell, ComponentLink3Description=http://www.farnell.com/datasheets/2151221.pdf?src-supplier=Element14, ComponentLink3URL=http://www.farnell.com/datasheets/2151221.pdf?src-supplier=Element14, ComponentLink4Description=http://www.st.com/content/ccc/resource/technical/document/datasheet/74/c4/19/54/62/c5/46/13/DM00177685.pdf/files/DM00177685.pdf/jcr:content/translations/en.DM00177685.pdf?src-supplier=Digi-Key, ComponentLink4URL=http://www.st.com/content/ccc/resource/technical/document/datasheet/74/c4/19/54/62/c5/46/13/DM00177685.pdf/files/DM00177685.pdf/jcr:content/translations/en.DM00177685.pdf?src-supplier=Digi-Key, Datasheet URL=http://www.st.com/content/ccc/resource/technical/document/datasheet/74/c4/19/54/62/c5/46/13/DM00177685.pdf/files/DM00177685.pdf/jcr:content/translations/en.DM00177685.pdf, Datasheet Version="Rev. 9, 09/2016", Manufacturer 1=STMicroelectronics, Manufacturer Part Number 1=LSM303AGRTR, Manufacturer URL=http://www.st.com/, Mounting Technology=SurfaceMount, Number of Pins=12, Output Type=SPI,I2C, Packaging=CutTape, Pricing 1="1=2.92000, 10=2.61800, 25=2.47520, 100=2.14500, 500=1.82600, 1000=1.54000 (USD)", REACH SVHC=NoSVHC, RoHS=Yes, RoHSCompliant=true, Sensor Type="Accelerometer,Magnetometer,3 Axis", Stock 1=7477, Supplier 1=Digi-Key

## Via types
v1: diameter 39.37, hole 19.68, Top Layer to Bottom Layer, 38 vias
v2: diameter 50, hole 28, Top Layer to Bottom Layer, 36 vias

## Nets (pads, with @x,y where several pads share a name; then routed paths per layer and width w, separated by ;. In a path a pad name is that pad's centre, name@x,y a point inside that pad or via, vN(x,y) a via of type N, cw(c..) or ccw(c..) an arc to the next point about the centre after c; other vN are vias at no path point)
3.3: C2.2 C7.2 L1.1 L3.2 P2.1 R2.2 U2.1 U2.15 U2.16 U3.9 U3.10 | length 2907.9
  Top Layer w3.5: U3.10 U3.10@175.71,425.26 ; L3.2 L3.2@385.15,205 ; 933.49,758.49 935,760
  Top Layer w7: U3.10 U3.9
  Top Layer w15: P2.1 87.03,92.03 184.65,92.03 308.41,215.79 L3.2 429.68,215.79 464.5,250.61 464.5,340.08 500,375.58 v2(500,530) ; U3.10@175.71,425.26 175.71,545.71 v2(176.65,546.65) ; L3.2@385.15,205 395.15,195 610,195 ; 503.96,400 536.49,367.46 590.14,367.46 667.67,445 v2(820,445) ; R2.2 610,195 ; C7.2@694.57,251.47 651.33,208.23 623.23,208.23 610,195 ; U2.15 743.07,1000.39 748.81,994.66 770.39,973.07 U2.1 771.61,886.11 853.22,804.5 885.54,804.5 913.8,776.24 913.8,766.33 L1.1 933.49,764.18 944.18,764.18 955,775 ; C2.2 925,720.71 955,750.71 955,775 ; v2(955,805) 955,775
  Bottom Layer w15: v2(176.65,546.65) 178.3,548.3 328.3,548.3 350.5,570.5 429.5,570.5 470,530 v2(500,530) ; v2(820,445) 820,450 955,585 v2(955,805)
+5: C8.2 P1.1 R1.2 U1.4 | length 360.3
  Top Layer w15: C8.2 848.42,36.29 848.42,93.78 U1.4 861.1,97.6 883.5,120 902.72,120 903.22,120.5 936.78,120.5 960.5,96.78 960.5,63.22 955,57.72 955,43.27 ; R1.2 942.72,30 955.49,42.78 986.63,42.78 986.83,42.97 1027.97,42.97 P1.1@1040,55
CS: P2.10 U2.5 | length 1208.5
  Top Layer w15: P2.10 19.97,1015.03 19.97,1189.97 55,1225 625,1225 710,1140 v2(710,1135) ; v2(810,1030) 818.17,1030 846.56,1001.61 U2.5
  Bottom Layer w15: v2(710,1135) 710,1132.5 810,1032.5 v2(810,1030)
CS_MAG: P2.5 U3.3 | length 303
  Top Layer w7: v2(200,310) 200,321.64 214.84,336.48 U3.3
  Bottom Layer w15: P2.5 72.79,462.21 117.03,462.21 200,379.23 v2(200,310)
CS_XL: P2.4 U3.2 | length 248.9
  Top Layer w7: v2(150,270) 150,312.91 195.16,358.07 U3.2
  Bottom Layer w15: P2.4 65,362.5 150,277.5 v2(150,270)
GND: C1.1 C2.1 C3.2 C4.2 C5.2 C7.1 C8.1 C9.1 C10.1 DS2.2 J1.2 J1.3 J1.4 J1.5 P1.12 P2.12 Q1.2 R5.1 U0.1 U0.10 U0.12 U1.2 U2.13 U3.6 U3.8 | length 4622.5
  Top Layer w3.5: U3.6 248.76,404.84 ; DS2.2 DS2.2@537.91,243.94 ; U0.1 U0.1@700.99,491.19 ; 722.2,132.8 724.4,135 ; U2.13@740.99,1080.46 U2.13 ; C1.1 C1.1@880.54,692.95 ; C5.2@918.01,161.99 C5.2
  Top Layer w7: U3.8 215,424.86 215,410 220,405 234.86,405 U3.6
  Top Layer w15: P2.12 123.4,1170 161.87,1131.53 J1.2@169.69,1133.66 ; J1.3@170.21,931.53 160.01,935.24 169.6,1131.8 J1.2@169.69,1133.66 ; v2(245,595) 245,479.31 259.31,465 ; 248.76,404.84 262.93,419.01 262.93,461.38 259.31,465 ; U0.12 326.11,751.11 443.89,751.11 v2(445,750) ; C10.1@330,414.53 324.09,414.53 273.62,465 259.31,465 ; C10.1@332.26,417.26 392.11,417.26 v2(394.38,415) ; v2(405,840) 404.42,839.42 325.58,839.42 U0.10 325,881.32 J1.4 380.07,1031.22 384.94,1131.05 J1.5@385.21,1136.53 ; v2(505,305) 511.7,298.3 511.7,270.15 537.91,243.94 560.63,266.65 Q1.2 563.68,326.95 751.95,326.95 v2(755,330) ; R5.1 670.49,58.22 715.5,103.22 715.5,126.1 722.2,132.8 ; U0.1@700.99,491.19 703.32,488.86 714.46,500 724.46,490 734.46,500 739.46,495 v2(780,495) ; v2(715,1210) 985,1210 P1.12@1040,1155 ; 724.4,135 U1.2 762.36,130.4 795.39,130.4 ; U2.13@740.99,1080.46 624.97,1080.46 C9.1 619.02,1085.43 572.92,1131.53 J1.5@385.21,1136.53 ; C7.1 772.89,245 836.02,245 889.4,191.62 889.4,152.2 893.3,148.3 ; C8.1 795.39,130.4 ; C1.1@880.54,692.41 922.26,692.41 922.26,687.26 C2.1 ; C4.2@959.46,163.44 956.02,160 920,160 918.01,161.99 904.32,148.3 893.3,148.3 ; J1.2@169.69,1133.66 174.28,1134.91 J1.2@180.21,1136.53 ; J1.2@169.69,1133.66 169.74,1134.77 174.53,1135.57 J1.2@180.21,1136.53 ; J1.2@180.21,1136.53 J1.5@385.21,1136.53 ; 795.39,130.4 861.37,130.4 873.98,143 888,143 893.3,148.3
  Bottom Layer w15: v2(245,595) 366.56,716.56 411.26,716.56 444.7,750 v2(445,750) 445,750.57 405,790.57 v2(405,840) ; J1.5 453.68,1210 v2(715,1210) ; v2@400,410 v2(505,305) ; v2(780,495) 780,480.53 755,455.53 v2(755,330) 760,330 835,255 v2(835,245)
  other v1: 600,525 580,620 910,635 235,665 615,665 190,700 585,710 240,730 150,740 615,755 210,775 160,795 200,840 130,845 575,905 255,960 505,975 455,990 210,1000 128.9,1004.75 405,1030 475,1050 200,1060 130.18,1061.1 340,1065 444.28,1096.19 275,1105 638.94,1153.19 310,1185 241.6,1187.96 639.37,1261.53 340,1265 425,1265 480.71,1266.05 225.23,1267.24 70,1270 140,1270 540,1275
INT1: P1.9 U2.7 | length 300
  Top Layer w15: U2.7 876.93,1053.52 877.3,1053.9 933.9,1053.9 v2(935,1055)
  Bottom Layer w3.5: P1.9@1035,860 P1.9@1040,855
  Bottom Layer w15: v2(935,1055) 935,970 P1.9
INT1_XL: P2.6 U3.12 | length 256.8
  Top Layer w7: P2.6 95,570 125,540 125,420 159.85,385.15 U3.12
INT2: P1.10 U2.6 | length 202.1
  Top Layer w10: U2.6 909.06,1027.2 971.26,965 1025,965 P1.10@1045,945
INT2_XL: P2.7 U3.11 | length 318.7
  Top Layer w7: P2.7 140,595 140,426.21 161.38,404.84 U3.11
INT_MAG: P2.8 U3.7 | length 415.2
  Top Layer w7: P2.8 154.03,680.97 154.03,634.35 213.15,575.23 213.15,484.29 234.53,462.91 U3.7
NetC6_1: C6.1 D1.1 | length 54
  Bottom Layer w7: C6.1 496.04,865 498.84,867.8 498.84,881.8 516.28,899.25 D1.1@516.28,910
NetC9_2: C9.2 U2.14 | length 143.4
  Top Layer w15: C9.2 624.57,1010 680,1010 721.2,1051.2 742.7,1051.2 743.07,1051.58 U2.14
NetC10_2: C10.2 U3.5 | length 109.7
  Top Layer w7: U3.5 299.41,385.15 325,359.57 C10.2@325,350.47
NetDS1_1: DS1.1 R3.1 | length 139.8
  Top Layer w3.5: R3.1@924.61,350 R3.1
  Top Layer w15: DS1.1 835.33,356.6 918.01,356.6 R3.1@924.61,350
NetDS1_2: DS1.2 Q1.3 | length 107.5
  Top Layer w15: Q1.3 706.31,361.31 DS1.2
NetDS2_1: DS2.1 R4.1 | length 336.3
  Top Layer w5: DS2.1 595,243.94 644.53,293.46 859.88,293.46 880.39,272.95 R4.1@880.39,255
NetL3_1: L3.1 U1.3 | length 432.3
  Top Layer w7: L3.1 405.63,32.94 699.81,32.94 739.6,72.73 739.6,88.3 748.9,97.6 U1.3
NetR1_1: R1.1 U1.1 | length 421.5
  Top Layer w3.5: U1.1@752.46,167.11 U1.1
  Top Layer w15: v2(675,120) 722.11,167.11 U1.1@752.46,167.11 ; R1.1 909.25,30 912.58,33.33 912.58,63.11 920,70.53 v2(920,80)
  Bottom Layer w15: v2(675,120) 715,80 v2(920,80)
NetR2_1: R2.1 R5.2 U1.5 | length 325.8
  Top Layer w3.5: U1.5@847.81,172.4 U1.5
  Top Layer w10: R2.1 613.86,148.86 633.86,148.86 685,200 815.79,200 843.39,172.4 U1.5@847.81,172.4
  Top Layer w15: R5.2 R2.1
PPS: Q1.1 U0.4 | length 320.8
  Top Layer w15: Q1.1 560.63,550.63 632.3,622.3 U0.4
RF_IN: D1.2 J1.1 L2.2 U0.11 | length 697.4
  Top Layer w21: J1.1 275.21,1015.9 293.19,997.92 293.19,919.7 267.13,893.65 267.13,815.43 281.78,800.78 319.75,800.78 U0.11 437.68,795.53 457.15,815 v2(465,815)
  Bottom Layer w20: 461.12,870 461.12,818.88 v2(465,815)
  Bottom Layer w21: 461.12,870 461.12,880.63 490.5,910 ; v2(465,815) 472.44,815 515,772.44 L2.2
RX: C5.1 P1.3 U0.3 | length 705.8
  Top Layer w7: U0.3@710,575 726.24,591.24 787.77,591.24 791.33,594.81 843.43,594.81 924.84,513.4 924.84,446.54 978.98,392.41 978.98,245 ; C5.1 920,186.81 950.49,217.31 951.28,217.31 978.98,245 ; P1.3@1045,245 1034.96,255.04 1015.95,255.04 1005.91,245 978.98,245
SCL: P2.3 U0.17 U2.2 U3.1 | length 1843.2
  Top Layer w3.5: v2(345,300) v2@345,305
  Top Layer w5: v2@345,305 v2@350,305
  Top Layer w7: P2.3 159.98,364.98 U3.1 ; v2@350,305 430.88,385.88 430.88,504.12 v2(405,530)
  Top Layer w15: U0.17 327.85,532.85 402.15,532.85 v2(405,530) ; U2.2 797.2,928.3 v2(880.25,845.25)
  Bottom Layer w15: P2.3 65,260 100,225 270,225 v2(345,300) ; v2(405,530) 455.22,479.78 721.03,479.78 734.5,493.25 734.5,811.78 767.97,845.25 v2(880.25,845.25)
SDA: P2.2 U0.16 U2.3 U3.4 | length 1610.7
  Top Layer w7: U0.16 407.62,579 445.88,540.74 445.88,345.88 v2(420,320) ; 405.38,581.24 582.3,758.16 582.3,795.68 705,918.38 v2(705,930)
  Top Layer w15: P2.2 160,170 235.5,245.5 235.5,265.5 v2(280,310) 280,319.47 252.09,347.38 U3.4@235.26,364.24 ; U2.3 824.02,973.07 824.39,972.7 824.39,945.61 830,940 838.17,940 855.53,922.64 v2(865,922.64)
  Bottom Layer w15: v2(280,310) 310.5,340.5 361.78,340.5 375.58,326.7 413.3,326.7 v2(420,320) ; v2(705,930) 705,927.64 701.18,923.82 863.82,923.82 v2(865,922.64)
SDO: P2.9 U2.4 | length 1041.3
  Top Layer w15: U2.4 848.76,972.7 877.3,972.7 920,930 920,895 v2(925,890)
  Bottom Layer w7: P2.9 71.5,876.5 394.9,876.5 454.59,936.19 647.2,936.19 697.24,886.14 921.14,886.14 v2(925,890)
SYS_RST: P1.5 U0.9 | length 563.6
  Top Layer w7: U0.9 708.64,830 750,830 v2(780,800) ; v2(810,660) 835,660 P1.5@1040,455
  Bottom Layer w7: v2(780,800) 780,727.5 810,697.5 v2(810,660)
TX: C4.1 P1.2 U0.2 | length 704.9
  Top Layer w7: U0.2 709.11,545 786.62,545 870,461.62 v2(870,405) ; C4.1 1008.98,186.02 P1.2@1040,155
  Bottom Layer w3.5: P1.2@1035,160 P1.2@1040,155
  Bottom Layer w15: 869.97,284.97 987.97,166.97 1038.03,166.97 P1.2 ; 870,285 v2(870,405)
VCC_IO: C1.2 L1.2 R3.2 R4.2 U0.6 U0.7 U0.8 | length 931.4
  Top Layer w8: v2(828.31,558.31) 828.31,525.23 885.5,468.04 885.5,462.95 912.27,436.19 912.27,409.39 916.56,405.1 933.44,405.1 933.44,394.12 953.73,373.83 953.73,277.08 942.11,265.45 937.11,265.45 937.11,262.28 929.83,255 R4.2@929.61,255
  Top Layer w15: U0.7 699.8,715 U0.6 778.92,708.92 831.45,761.45 881.91,761.45 L1.2@884.06,763.59 ; U0.8 699.8,760.35 U0.7@703.87,756.29 ; C1.2@883.74,718.74 884.06,719.05 L1.2@884.06,763.59 ; L1.2 L1.2@884.06,763.59
  Bottom Layer w15: v2(825,755) 829,751 829,698.28 850.5,676.78 850.5,589.97 828.31,567.78 v2(828.31,558.31)
VCC_RF: C3.1 C6.2 L2.1 U0.14 | length 839
  Top Layer w15: U0.14 333.25,657.36 383.17,657.36 395.53,645 v2(405,645) 563.3,803.3 563.3,828.3 v2(570,835)
  Bottom Layer w3.5: C3.1 C3.1@399.55,689.43 ; v2@399.55,645.45 405,640 v2(405,645) ; C6.2 532.82,865 540,865 v2(570,835)
  Bottom Layer w5: v2@399.55,645.45 C3.1@399.55,689.43
  Bottom Layer w15: v2(405,645) 470,580 668.62,580 L2.1 ; 532.82,865 562.82,835 v2(570,835)
WAKE_UP: P1.4 U0.5 | length 496.6
  Top Layer w7: U0.5 712.05,653.36 765.02,653.36 808.57,609.81 849.64,609.81 939.84,519.61 939.84,465.16 P1.4
pads on no net: P1.6 P1.7 P1.8 P1.11 P2.11 U0.13 U0.15 U0.18 U2.8 U2.9 U2.10 U2.11 U2.12

## Polygon pours and split planes (outlines as drawn)
GND on Bottom Layer "Bottom Layer-GND" (solid, pour order 16): 182 vertices, not listed, extent 21.11,185.03 957.53,1334.1
GND on Bottom Layer "GND_L02_P010" (solid, remove dead copper, pour order 10): 0,0 1105,0 1105,1305 0,1305
GND on Top Layer "Top Layer-GND" (solid, pour order 14): 315 vertices, not listed, extent -184.1,366.18 898.89,1484.41
GND on Top Layer "GND_L01_P012" (solid, remove dead copper, pour order 12): 0,0 1105,0 1105,1305 0,1305

## Silkscreen, mask and mechanical layers (free items; w line width, h text height)
Top Overlay:
  text "DESIGNED BY RAHAMATH ALI" at 690,1250 h30
Bottom Overlay:
  text "MADE IN RUDRA LABS" at 465,55 h30